# EAGLE board ADS124S08-Dev-Board (EAGLE 9.6.2)
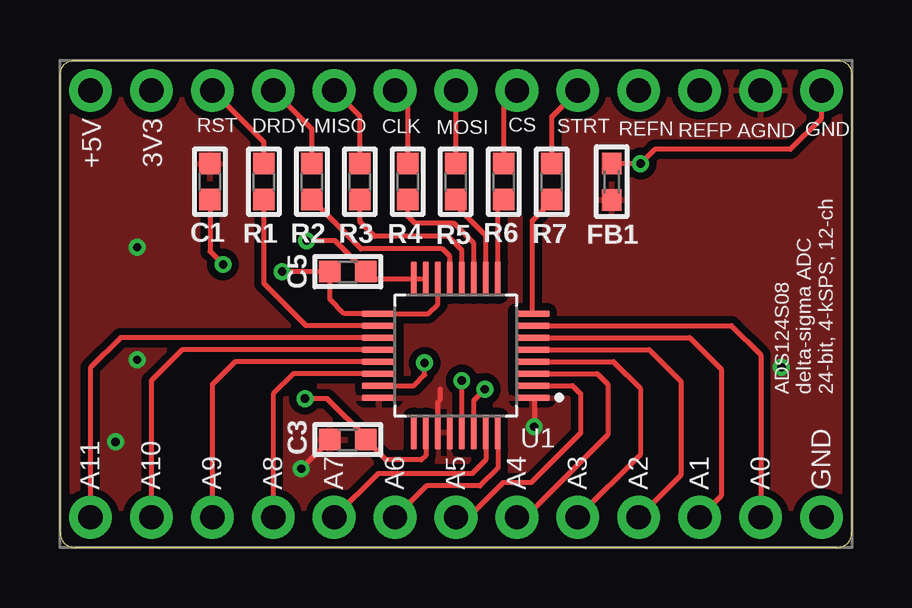
[diagram p0: board, top side]
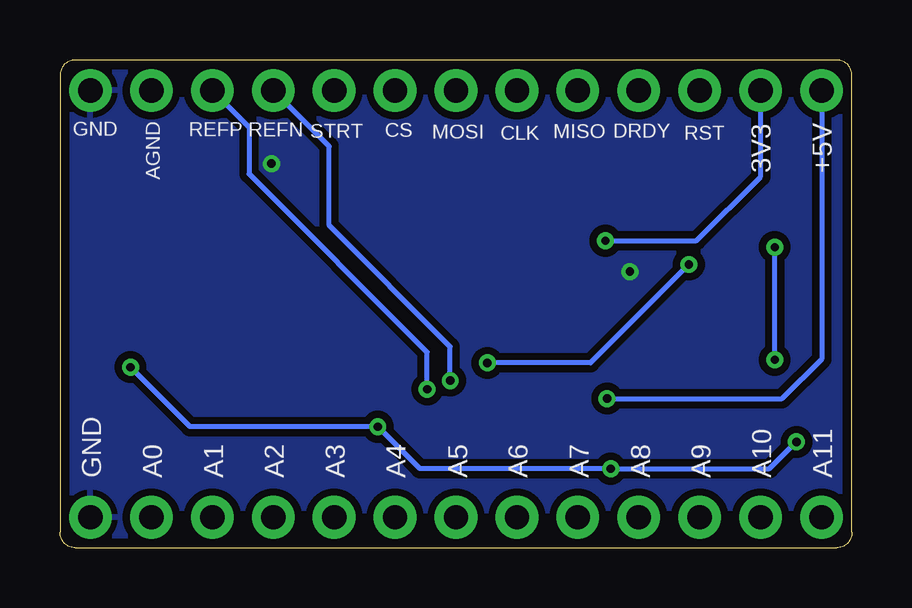
[diagram p1: board, bottom side, seen from below]

Size 33.02 x 20.32 mm. Coordinates in mm from the lower left corner, seen from the top.
Outline: 0,0.64 0,19.68 arc-90 0.64,20.32 32.38,20.32 arc-90 33.02,19.68 33.02,0.64 arc-90 32.38,0 0.64,0 arc-90 0,0.64
Copper layers (1*16): Top 0.035mm / dielectric 0.8mm / Bottom 0.035mm
Design rules "oizom": minimum track width 8mil, minimum drill 0.35mm, track to track 12mil, track to pad 12mil, pad to pad 12mil, via to via 12mil, smd to smd 8mil, copper to edge 15mil, drill to drill 12mil, minimum pad ring 7mil, minimum via ring 7mil, stop-mask expansion 4mil, vias tented up to drill 25mil, thermal gap 10mil

## Footprints (pad centres in the part's own frame; a part is rotated, then mirrored left to right if it is on the bottom)
C0603-MINI = smd 0.9 x 0.9: 1 -0.75,0; 2 0.75,0
_0603 = smd 0.9 x 0.8: 1 -0.762,0; 2 0.762,0
R0603-MINI = smd 0.9 x 0.9: 1 -0.75,0; 2 0.75,0
QFP50P700X700X120-32N = smd 1.44 x 0.26: 1 -3.195,1.75; 2 -3.195,1.25; 3 -3.195,0.75; 4 -3.195,0.25; 5 -3.195,-0.25; 6 -3.195,-0.75; 7 -3.195,-1.25; 8 -3.195,-1.75; 17 3.195,-1.75; 18 3.195,-1.25; 19 3.195,-0.75; 20 3.195,-0.25; 21 3.195,0.25; 22 3.195,0.75; 23 3.195,1.25; 24 3.195,1.75 | smd 0.26 x 1.44: 9 -1.75,-3.195; 10 -1.25,-3.195; 11 -0.75,-3.195; 12 -0.25,-3.195; 13 0.25,-3.195; 14 0.75,-3.195; 15 1.25,-3.195; 16 1.75,-3.195; 25 1.75,3.195; 26 1.25,3.195; 27 0.75,3.195; 28 0.25,3.195; 29 -0.25,3.195; 30 -0.75,3.195; 31 -1.25,3.195; 32 -1.75,3.195
ADS124S08-BOARD = drill 1.016 pad 1.778: 1 0,0; 2 2.54,0; 3 5.08,0; 4 7.62,0; 5 10.16,0; 6 12.7,0; 7 15.24,0; 8 17.78,0; 9 20.32,0; 10 22.86,0; 11 25.4,0; 12 27.94,0; 13 30.48,0; 14 0,17.78; 15 2.54,17.78; 16 5.08,17.78; 17 7.62,17.78; 18 10.16,17.78; 19 12.7,17.78; 20 15.24,17.78; 21 17.78,17.78; 22 20.32,17.78; 23 22.86,17.78; 24 25.4,17.78; 25 27.94,17.78; 26 30.48,17.78

## Placement (x,y rotation side)
C1  1uF  [C0603-MINI]  6.25,15.25 90 top
C3  330nF  [C0603-MINI]  12,4.5 180 top
C5  0.1uF  [C0603-MINI]  12,11.5 180 top
FB1  [_0603]  23,15.25 90 top
R1  47R  [R0603-MINI]  8.5,15.25 270 top
R2  47R  [R0603-MINI]  10.5,15.25 270 top
R3  47R  [R0603-MINI]  12.5,15.25 270 top
R4  47R  [R0603-MINI]  14.5,15.25 270 top
R5  47R  [R0603-MINI]  16.5,15.25 270 top
R6  47R  [R0603-MINI]  18.5,15.25 270 top
R7  47R  [R0603-MINI]  20.5,15.25 270 top
U1  ADS124S08IPBSR  [QFP50P700X700X120-32N]  16.5,8 180 top
U$1  ADS124S08-BOARD  [ADS124S08-BOARD]  1.27,1.27 0 top

## Library data of the parts
C1 C3 C5 = eventHorizon; MF: AVX; MPN: 08055C104JAT2A; OC_FARNELL: 1740673
FB1 U$1 = electroShri
R1-R7 = eventHorizon
U1 = electroShri; AVAILABILITY: Good; DESCRIPTION: 24-bit, 4-kSPS, 12-ch delta-sigma ADC with PGA and voltage reference for sensor measurement 32-TQFP -50 to 125; MF: Texas Instruments; MP: ADS124S08IPBSR; PACKAGE: TQFP-32 Texas Instruments; PRICE: None; PURCHASE-URL: https://pricing.snapeda.com/search/part/ADS124S08IPBSR/?ref=eda

## Nets
3V3: C5.1 U1.15 U1.16 U$1.15
!CS: R6.1 U$1.21
!DRDY: R2.1 U$1.17
!RESET: R1.1 U$1.16
+5V: C3.1 U1.26 U$1.14
AGND: C1.2 C3.2 FB1.1 U1.1 U1.24 U1.27 U1.28 U$1.25
AIN0: U1.7 U$1.12
AIN1: U1.6 U$1.11
AIN2: U1.5 U$1.10
AIN3: U1.4 U$1.9
AIN4: U1.3 U$1.8
AIN5: U1.2 U$1.7
AIN6: U1.32 U$1.6
AIN7: U1.31 U$1.5
AIN8: U1.22 U$1.4
AIN9: U1.21 U$1.3
AIN10: U1.20 U$1.2
AIN11: U1.19 U$1.1
DGND: C5.2 FB1.2 U1.14 U1.17 U$1.13 U$1.26
MISO: R3.1 U$1.18
MOSI: R5.1 U$1.20
N$7: C1.1 U1.23
REFN0: U1.29 U$1.23
REFP0: U1.30 U$1.24
SCLK: R4.1 U$1.19
START: R7.1 U$1.22
~!CS: R6.2 U1.9
~!DRDY: R2.2 U1.13
~!RESET: R1.2 U1.18
~MISO: R3.2 U1.12
~MOSI: R5.2 U1.10
~SCLK: R4.2 U1.11
~START: R7.2 U1.8

## Tracks (layer width: path | path; a pad name or v marks a point on that pad's centre or on a via)
3V3  (via drill 0.35)
  Top 0.203: U1.15 U1.16 13.05,11.2 C5.1 11.46,12.79 v10.28,12.79
  Bottom 0.203: v10.28,12.79 6.48,12.79 3.81,15.46 U$1.15
!CS
  Top 0.203: R6.1 18.5,18.5 U$1.21
!DRDY
  Top 0.203: R2.1 10.5,17.44 U$1.17
!RESET
  Top 0.203: R1.1 8.5,16.9 U$1.16
+5V  (via drill 0.35)
  Top 0.203: U1.26 15.25,3.84 15.07,3.66 13.59,3.66 C3.1 12.75,4.6 11.14,6.21 v10.21,6.21
  Bottom 0.203: U$1.14 1.27,7.86 2.92,6.21 v10.21,6.21
AGND  (via drill 0.35)
  Top 0.203: v19.77,5.04 19.77,6.17 U1.1 | C3.2 11.25,4.48 v10.06,3.29 | U1.27 15.75,6.07 15.86,6.18 15.86,6.61
  Bottom 0.203: v30.08,7.52 27.6,5.04 v19.77,5.04 18.02,3.29 v10.06,3.29 3.44,3.29 v2.32,4.41 | v3.22,7.83 v3.22,12.52
  pour Top (isolate 0.254): -1,-1 -1,21.68 33.9,21.68 33.9,-1
AIN0
  Top 0.203: U1.7 27.99,9.25 29.21,8.03 U$1.12
AIN1
  Top 0.203: U1.6 26.26,8.75 27.57,7.44 27.57,2.17 U$1.11
AIN2
  Top 0.203: U1.5 24.57,8.25 25.88,6.94 25.88,3.02 U$1.10
AIN3
  Top 0.203: U1.4 23.08,7.75 24.19,6.64 24.19,3.88 U$1.9
AIN4
  Top 0.203: U1.3 22.4,7.25 22.84,6.81 22.84,4.71 19.4,1.27 U$1.8
AIN5
  Top 0.203: U1.2 21.37,6.75 21.7,6.42 21.7,4.77 19.64,2.71 18.47,2.71 17.03,1.27 U$1.7
AIN6
  Top 0.203: U$1.6 15.28,2.58 17.51,2.58 18.25,3.32 U1.32
AIN7
  Top 0.203: U1.31 17.75,3.66 17.18,3.09 13.25,3.09 U$1.5
AIN8
  Top 0.203: U1.22 9.73,7.25 8.89,6.41 U$1.4
AIN9
  Top 0.203: U1.21 7.31,7.75 6.35,6.79 U$1.3
AIN10
  Top 0.203: U1.20 5.1,8.25 3.81,6.96 U$1.2
AIN11
  Top 0.203: U1.19 2.53,8.75 1.27,7.49 U$1.1
DGND  (via drill 0.35)
  Top 0.203: v9.26,11.5 C5.2 11.25,10.35 11.85,9.75 U1.17 15.35,9.75 15.75,10.15 U1.14 | FB1.2 24.19,16.01 v24.2,16 24.8,16.6 30.45,16.6 31.75,17.9 U$1.26
  pour Bottom (isolate 0.254): -2,-2 -2,22.68 34.9,22.68 34.9,-2
MISO
  Top 0.203: R3.1 12.5,17.98 U$1.18
MOSI
  Top 0.203: R5.1 U$1.20
N$7  (via drill 0.35)
  Top 0.203: C1.1 6.25,12.35 v6.8,11.8 | v15.2,7.7 15.2,7.2 14.75,6.75 U1.23
  Bottom 0.203: v6.8,11.8 10.9,7.7 v15.2,7.7
REFN0  (via drill 0.35)
  Top 0.203: U1.29 v16.75,6.96
  Bottom 0.203: v16.75,6.96 16.75,8.38 21.8,13.43 21.8,16.72 U$1.23
REFP0  (via drill 0.35)
  Top 0.203: U1.30 17.25,6.14 v17.71,6.6
  Bottom 0.203: v17.71,6.6 17.71,8.15 25.14,15.58 25.14,17.52 U$1.24
SCLK
  Top 0.203: R4.1 14.5,18.52 U$1.19
START
  Top 0.203: R7.1 20.5,17.96 U$1.22
~!CS
  Top 0.203: U1.9 18.25,14.25 R6.2
~!DRDY
  Top 0.203: U1.13 16.25,12.14 15.94,12.45 12.55,12.45 R2.2
~!RESET
  Top 0.203: U1.18 10.25,9.25 8.5,11 R1.2
~MISO
  Top 0.203: U1.12 16.75,12.4 16.18,12.97 13.12,12.97 12.5,13.59 R3.2
~MOSI
  Top 0.203: U1.10 17.75,12.99 16.5,14.24 R5.2
~SCLK
  Top 0.203: U1.11 17.25,12.68 16.42,13.51 14.81,13.51 14.5,13.82 R4.2
~START
  Top 0.203: U1.8 19.7,13.63 20.5,14.44 R7.2

## Text on the board
tPlace: +5V | 3V3 | RST | DRDY | MISO | CLK | MOSI | CS | STRT | REFN | REFP | AGND | GND | ADS124S08 / delta-sigma ADC / 24-bit, 4-kSPS, 12-ch | A11 | A10 | A9 | A8 | A7 | A6 | A5 | A4 | A3 | A2 | A1 | A0 | GND
bPlace: +5V | 3V3 | AGND | RST | DRDY | MISO | CLK | MOSI | CS | STRT | REFN | REFP | GND | A11 | A10 | A9 | A8 | A7 | A6 | A5 | A4 | A3 | A2 | A1 | A0 | GND